# Altium PCB PCB.PcbDoc
Units mm, origin at the board's own origin, x right, y up, seen from the top; angles counter-clockwise.
Board outline 152.4 x 101.6 mm, 2 copper layers (Top Layer, Bottom Layer); 14 components, 16 nets, 56 pads, 0 vias.
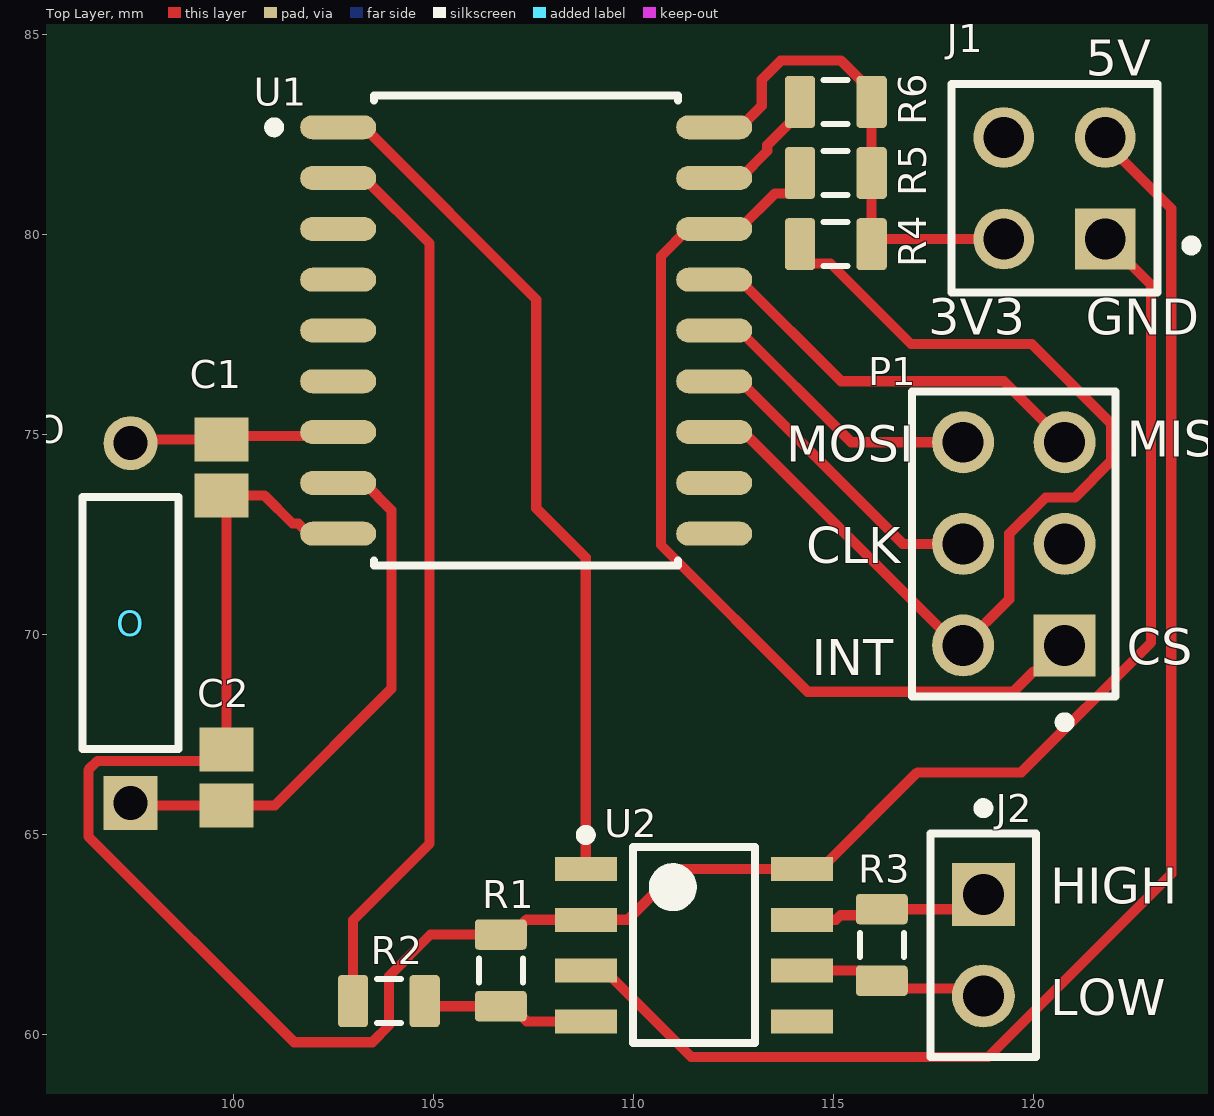
[diagram p0: Top Layer view]
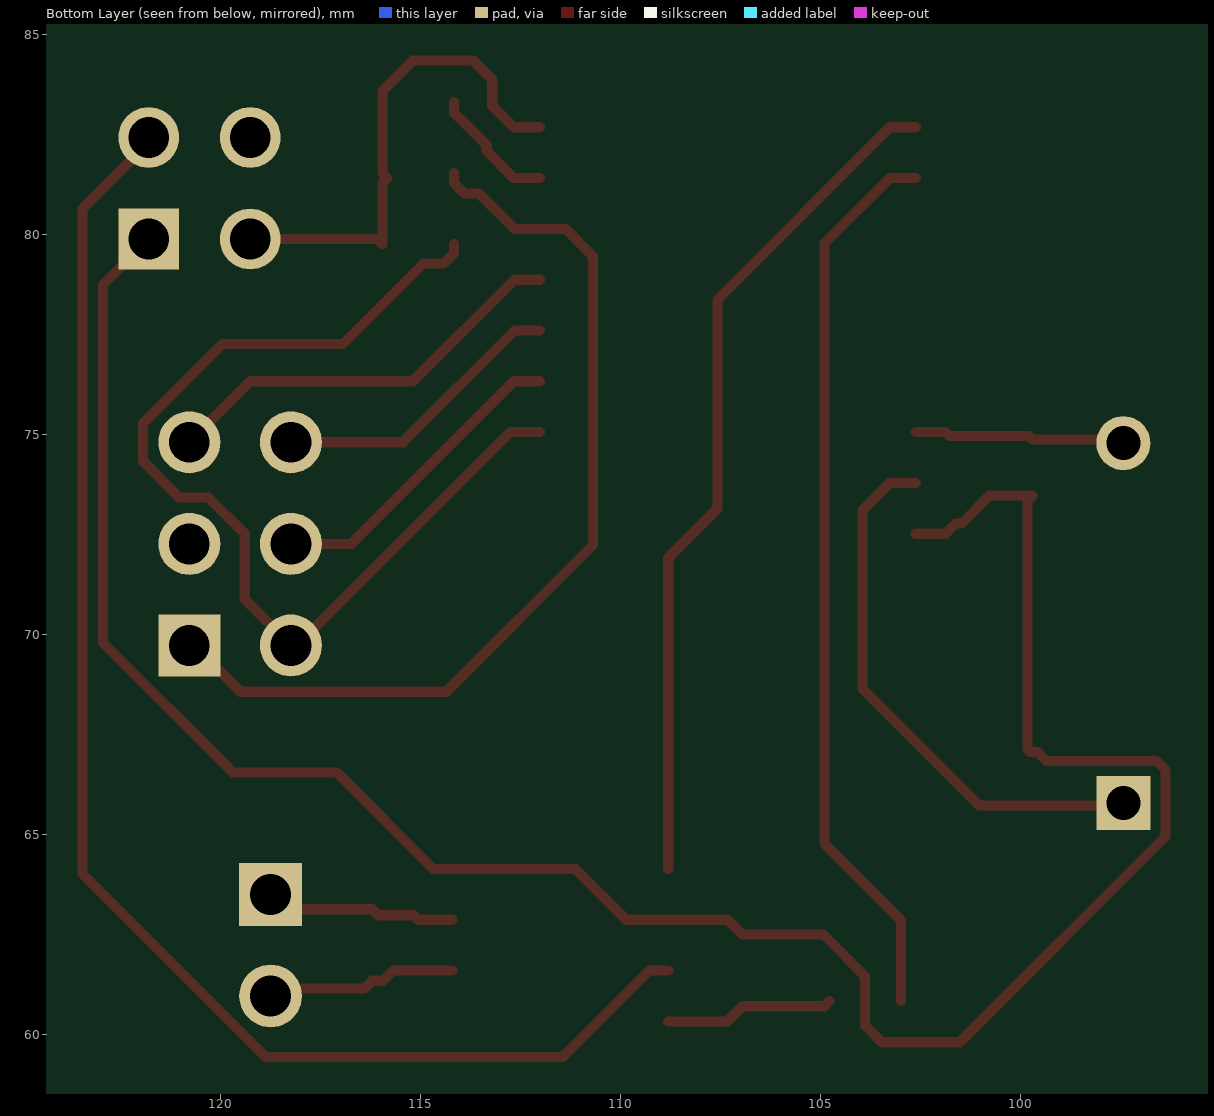
[diagram p1: Bottom Layer view, seen from below]
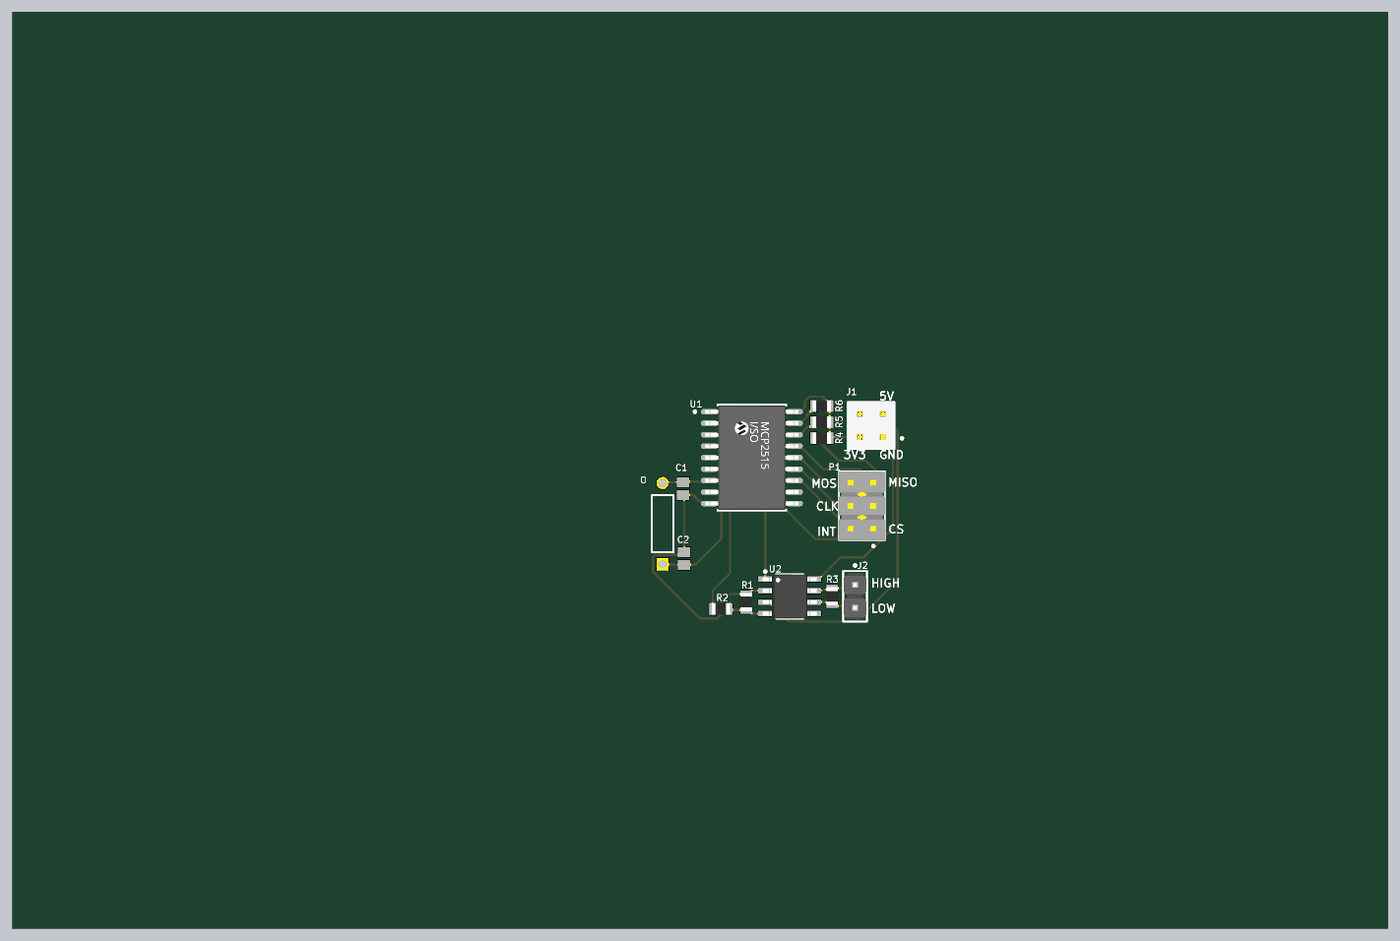
[diagram p2: 3D render of the assembled board from above, using the file's embedded part models]

## Layer stack, top to bottom
Top Solder: solder mask 0.0102, Solder Resist, Dk 3.5
Top Layer: signal copper 0.0356
Dielectric 1: dielectric 0.32, FR-4, Dk 4.8
Bottom Layer: signal copper 0.0356
Bottom Solder: solder mask 0.0102, Solder Resist, Dk 3.5

## Board outline
25.4,25.4 177.8,25.4 177.8,127 25.4,127

## Design rules (kind name [scope] priority, off if disabled: settings)
Clearance [All] p1: gap=0.254 ignorepadtopadclearanceinfootprint=FALSE except(0: Arc-Hole Track-Hole SMDPad-Hole THPad-Hole Via-Hole Fill-Hole Poly-Hole Region-Hole Text-Hole)
PolygonConnect [All] p1: connectstyle=Relief reliefconductorwidth=0.254 reliefentries=4 polygonreliefangle="90 Angle" airgapwidth=0.254
RoutingVias [All] p1: holewidth=0.711 width=1.27 viastyle="Through Hole" minholewidth=0.711 minwidth=1.27 maxholewidth=0.711 maxwidth=1.27
SolderMaskExpansion [All] p1: expansion=0.102 istentingtop=FALSE
Width [All] p1: maxlimit=0.254 minlimit=0.254 preferedwidth=0.254
30 further rules are at their usual default settings.

## Classes and differential pairs
component class Sheet1: C1 C2 O R1 R2 R3 R4 R5 R6 U1 U2
component class RaspPI: J1 J2 P1

## Components (designator, comment, footprint, x,y, rotation, side; value= is the part's Value field where it differs from the comment)
C1 "22pF" CAPC2013X140X50LL20T25 99.695,74.168 r90 top
C2 "22pF" CAPC2013X140X50LL20T25 99.822,66.421 r270 top
J1 "HTSW-102-07-G-D" FP-HTSW-102-07-G-D-MFG 120.523,81.153 r90 top
J2 "M20-9990246" FP-M20-9990246-MFG 118.745,62.23 r270 top
O "16MHz" RESA60-630X240 97.427,70.279 r90 top
P1 "TSW-103-08-L-D" SMTC-TSW-103-08-L-D_V 119.507,72.263 r90 top
R1 "1KR5J" RESC0805(2012)_L 106.68,61.595 r270 top value=22kΩ
R2 "1KR5J" RESC0805(2012)_L 103.886,60.833 r0 top value=10kΩ
R3 "1KR5J" RESC0805(2012)_L 116.205,62.23 r270 top value=120Ω
R4 "1KR5J" RESC0805(2012)_L 115.051,79.756 r180 top value=4.7kΩ
R5 "1KR5J" RESC0805(2012)_L 115.051,81.534 r180 top value=4.7kΩ
R6 "1KR5J" RESC0805(2012)_L 115.051,83.312 r180 top value=4.7kΩ
U1 "MCP2515-I/SO" FP-C04-051-MFG 107.315,77.597 r0 top
U2 "MCP2551-I/SN" MCHP-SN8_V 111.506,62.23 r0 top

## Footprints (in the part's own frame and the unit in brackets; to place one, negate y for a bottom-side part, rotate by r counter-clockwise, add the part's x,y. Pads: shape width x height; smd on the part's side, far side on the other; paste and mask are expansions set on the pad)
CAPC2013X140X50LL20T25 [mm] "Chip Capacitor, 2-Leads, Body 2.00x1.25mm, IPC High Density"
  rect 1.1x1.35 smd: 1(-0.7,0) 2(0.7,0)
  body extent -1.1,-0.72 1.1,0.72, height 1.4
FP-C04-051-MFG [mm]
  rrect100% 1.9x0.6 smd paste+0 mask+0: 1(-4.7,5.08) 2(-4.7,3.81) 3(-4.7,2.54) 4(-4.7,1.27) 5(-4.7,0) 6(-4.7,-1.27) 7(-4.7,-2.54) 8(-4.7,-3.81) 9(-4.7,-5.08) 10(4.7,-5.08) 11(4.7,-3.81) 12(4.7,-2.54) 13(4.7,-1.27) 14(4.7,0) 15(4.7,1.27) 16(4.7,2.54) 17(4.7,3.81) 18(4.7,5.08)
  silkscreen extent -6.42,-5.87 3.8,5.87, body extent -5.75,-6.12 5.75,6.12, height 0.25
FP-HTSW-102-07-G-D-MFG [mm]
  rect 1.52x1.52 hole 1.02 paste-1000 mask+0: 1(-1.27,-1.27)
  round 1.52 hole 1.02 paste-1000 mask+0: 2(-1.27,1.27) 3(1.27,-1.27) 4(1.27,1.27)
  silkscreen extent -2.6,-3.55 2.6,2.58, body extent -2.7,-2.68 2.7,2.68, height 0.25
FP-M20-9990246-MFG [mm]
  rect 1.57x1.57 hole 1.02 paste-1000 mask+0: 1(-1.27,0)
  round 1.57 hole 1.02 paste-1000 mask+0: 2(1.27,0)
  silkscreen extent -3.55,-1.32 2.79,1.32, body extent -2.89,-1.42 2.89,1.42, height 0.25
MCHP-SN8_V [mm] "SOIC, 8-Leads, Body 4.9x3.9mm, Pitch 1.27mm"
  rect 1.55x0.6 smd: 1(-2.7,1.905) 2(-2.7,0.635) 3(-2.7,-0.635) 4(-2.7,-1.905) 5(2.7,-1.905) 6(2.7,-0.635) 7(2.7,0.635) 8(2.7,1.905)
  silkscreen extent -2.82,-2.45 1.53,2.88, body extent -3,-2.45 3,2.45, height 1.75
RESA60-630X240 [mm] "Axial Resistor, 2-Leads, Dia 2.4mm, Body Length 6.3mm"
  rect 1.35x1.35 hole 0.85: 1(-4.5,0)
  round 1.35 hole 0.85: 2(4.5,0)
  silkscreen extent -3.15,-1.2 3.15,1.2, body extent -3.15,-1.2 3.15,1.2, height 2.4
RESC0805(2012)_L [mm] "Chip Resistor, Body 2.0x1.3mm, IPC High Density"
  rrect25% 0.76x1.3 smd: 1(-0.9,0) 2(0.89,0)
  silkscreen extent -0.3,-0.55 0.3,0.55, body extent -1,-0.62 1,0.63, height 0.6
SMTC-TSW-103-08-L-D_V [mm] "CONN, 6-Leads, Body 7.62x5.08mm, Pitch 2.54mm"
  rect 1.55x1.55 hole 1.02: 1(-2.54,-1.27)
  round 1.55 hole 1.02: 2(-2.54,1.27) 3(0,-1.27) 4(0,1.27) 5(2.54,-1.27) 6(2.54,1.27)
  silkscreen extent -4.58,-2.54 3.81,2.54, body extent -3.81,-2.54 3.81,2.54, height 8.38

## Part data
C1 C2: library part CMP-2000-05810-1, "Chip Capacitor, 2.2 uF, +/- 10%, 10 V, -55 to 85 degC, 0805 (2012 Metric), RoHS, Tape and Reel", Capacitance=2.2µF, Case Size/Dimension=0805, Dielectric=X5R, Manufacturer=AVX, Package Description="2-Pin Surface Mount Device, Body 2.01 x 1.25 mm", Rated Voltage=10V, Tolerance (%)=±10%, Datasheet URL=http://datasheets.avx.com/cx5r.pdf, Datasheet Version=05/2016, Manufacturer URL=http://www.avx.com/, Mounting Technology=SurfaceMount, Package Reference=0805
J1: library part CMP-02766-000010-1, "CONN HEADER VERT 4POS 2.54MM", Current Rating=6.3A, Manufacturer=Samtec, Temperature="-55°C to +125°C", Temperature Range High=+125°C, Temperature Range Low=-55°C, Voltage Rating=550V, Automotive=No, Category=Conn, ComponentLink2Description=Datasheet, ComponentLink2URL=http://suddendocs.samtec.com/catalog_english/htsw_th.pdf, Conn Gender=Male, Conn Orientation=Straight, Contact Material=Gold,Nickel, Device Class L1=Connectors, Device Class L2="Headers and Wire Housings", Device Class L3=unset, Digikey Description="CONN HEADER VERT 4POS 2.54MM", Height=8.71mm, Lead Free=Yes, Manufacturer Part Number=HTSW-102-07-G-D, Mouser Description="Conn Unshrouded Header HDR 4 POS 2.54mm Solder ST Thru-Hole Bag", Number Of Contacts=4, Number Of Rows=2, Octopart=https://octopart.com/htsw-102-07-g-d-samtec-10531767, Package=HTSW-102-07-G-D, Pitch=2.54mm, RoHS=TRUE
J2: library part CMP-15831-000009-1, "CONN HEADER VERT 2POS 2.54MM", Current Rating=3A, Manufacturer=Harwin, Temperature="-40°C to +105°C", Temperature Range High=+105°C, Temperature Range Low=-40°C, Automotive=No, Category=Conn, ComponentLink2Description=Datasheet, ComponentLink2URL=https://cdn.harwin.com/pdfs/M20-999.pdf, Conn Gender=Male, Conn Orientation=Vertical, Contact Material=Tin,Nickel, Device Class L1=Connectors, Device Class L2="Headers and Wire Housings", Device Class L3=unset, Digikey Description="CONN HEADER VERT 2POS 2.54MM", Height=8.99mm, Lead Free=Yes, Manufacturer Part Number=M20-9990246, Mouser Description="2.54mm (0.1\") Pitch SIL Vertical PC Tail Pin Header, 6.1mm mating pin height, tin, 2 contacts", Number Of Contacts=2, Number Of Rows=1, Octopart=https://octopart.com/m20-9990246-harwin-2590635, Package=M20-9990246, Pitch=2.54mm, RoHS=TRUE
O: library part CMP-1659-00075-1, "Axial Resistor, 1 KOhm, +/- 1%, 250 mW, -55 to 155 degC, 2-Pin THD, RoHS, Bulk", Case\Package=Axial, Max Operating Temperature="155 degC", Min Operating Temperature="-55 degC", Package Quantity=200, Power Rating="250 mW", Resistance="10 kohm", Tolerance=1%, Voltage Rating="250 V", ComponentLink1Description="Manufacturer URL", ComponentLink1URL=http://www.yageo.com/, ComponentLink2Description=Datasheet, ComponentLink2URL=http://www.yageo.com/documents/recent/Yageo%20LR_MFR_2013.pdf, DatasheetVersion=Apr-13, Length="0.248 inch", PackageDescription="2-Pin Axial Lead, Dia 2.4 mm, Body Length 6.3 mm", PackageReference=MFR-25, Packaging=Bulk, RoHSCompliant=true
P1: library part CMP-1024-00336-5, "Male Header, Pitch 2.54 mm, 2 x 3 Position, Height 8.38 mm, Tail Length 5.08 mm, -55 to 125 degC, RoHS, Bulk", Manufacturer=Samtec, Max Operating Temperature="125 degC", Min Operating Temperature="-55 degC", ComponentLink1Description="Manufacturer URL", ComponentLink1URL=http://www.samtec.com/, ComponentLink2Description=Datasheet, ComponentLink2URL=https://datasheet.ciiva.com/25618/0900766b81154476-25618436.pdf, ComponentLink3Description="Package Specification", ComponentLink3URL=http://suddendocs.samtec.com/prints/tsw-xxx-xx-x-x-xx-xxx-footprint.pdf, DatasheetVersion=04/2012, Lead Pitch="2.54 mm", Mount="Through Hole", Mounting Technology="Through Hole", PackageDescription="Male Header, Pitch 2.54 mm, 2 x 3 Position, Height 8.38 mm, Tail Length 5.08 mm", PackageReference=TSW-103-08-L-D, RoHSCompliant=true
R1 R2 R3 R4 R5 R6: library part CMP-009-00076-1, "1K 0.125W 5% 0805 (2012 Metric)  SMD", Case/Package=0805, Power=0.125W, Tolerance=5%, Mounting Technology=SMT, Pins=2
U1: library part CMP-0186-00133-3, "IC CAN CONTROLLER W/SPI 18SOIC", Ambient Temperature Range High=+125°C, Ambient Temperature Range Low=-65°C, Manufacturer=Microchip, Max Supply Voltage=5.5V, Min Supply Voltage=2.7V, Nominal Supply Current=10mA, Package=C04-051, Temperature="-40°C to +85°C", Temperature Range High=+85°C, Temperature Range Low=-40°C, Automotive=No, Category=IC, ComponentLink2Description=Datasheet, ComponentLink2URL=http://ww1.microchip.com/downloads/en/DeviceDoc/MCP2515-Stand-Alone-CAN-Controller-with-SPI-20001801J.pdf, Device Class L1="Integrated Circuits (ICs)", Device Class L2="Interface ICs", Device Class L3=Controllers, Digikey Description="IC CAN CONTROLLER W/SPI 18SOIC", Footprint Url=http://ww1.microchip.com/downloads/en/DeviceDoc/18L_SOIC_Wide_7.50_SO_C04-0051D.pdf, Function=Controller, Height=2.65mm, Interface=SPI,CAN, Ipc Land Pattern Name=SOIC127P1030X265-18, Lead Free=Yes, Manufacturer Part Number=MCP2515-I/SO, Mouser Description="CAN Interface IC W/ SPI Interface", Octopart=https://octopart.com/mcp2515-i%2Fso-microchip-430187, RoHS=TRUE, Standoff Height=0.1mm
U2: library part CMP-0186-00138-3, "High-Speed CAN Transceiver, /  1 Mb/s, 4.5 to 5.5 V, 8-Pin SOIC (SN), Industrial Temperature, RoHS, Tube", Manufacturer=Microchip, ComponentLink1Description="Manufacturer URL", ComponentLink1URL=http://www.microchip.com/, ComponentLink2Description=Datasheet, ComponentLink2URL=http://ww1.microchip.com/downloads/en/DeviceDoc/21667f.pdf, ComponentLink3Description="Package Specification", ComponentLink3URL=http://www.microchip.com/stellent/groups/techpub_sg/documents/packagingspec/en012702.pdf, DatasheetVersion="Rev. F, 07/2010", Mounting Technology="Surface Mount", PackageDescription="8-Pin Small Outline Integrated Circuit, Body 4.9 x 3.9 mm, Pitch 1.27 mm", PackageReference=SN8, RoHSCompliant=true

## Nets (pads, with @x,y where several pads share a name; then routed paths per layer and width w, separated by ;. In a path a pad name is that pad's centre, name@x,y a point inside that pad or via, vN(x,y) a via of type N, cw(c..) or ccw(c..) an arc to the next point about the centre after c; other vN are vias at no path point)
3V3: J1.2 R4.1 R5.1 R6.1 U1.18 | length 12.6
  Top Layer w0.254: U1.18 112.665,82.677 113.205,83.217 113.205,83.869 113.679,84.343 115.19,84.343 115.951,83.582 R6.1 R5.1 115.824,81.407 115.951,81.28 R4.1 116.078,79.883 J1.2
5V: J1.3 U2.3 | length 36.5
  Top Layer w0.254: U2.3 109.281,61.595 111.44,59.436 118.87,59.436 123.444,64.01 123.444,80.645 121.793,82.296 J1.3
GND: C1.1 C2.1 J1.1 R1.1 U1.9 U2.2 U2.8 | length 59.2
  Top Layer w0.254: U1.9 101.871,72.517 101.617,72.771 101.473,72.771 100.776,73.468 C1.1 99.822,73.341 C2.1 99.757,67.056 99.568,67.056 99.347,66.835 96.594,66.835 96.371,66.612 96.371,64.947 101.516,59.802 103.468,59.802 103.886,60.22 103.886,61.456 104.925,62.495 R1.1 106.95,62.495 107.32,62.865 U2.2 109.855,62.865 111.125,64.135 U2.8 114.681,64.135 117.095,66.549 119.692,66.549 122.936,69.793 122.936,78.74 J1.1
NetC1_2: C1.2 O.2 U1.7 | length 5.3
  Top Layer w0.254: O.2 97.516,74.868 C1.2 99.784,74.957 101.771,74.957 101.871,75.057 U1.7
NetC2_2: C2.2 O.1 U1.8 | length 13.8
  Top Layer w0.254: O.1 97.486,65.721 C2.2 101.03,65.721 103.946,68.637 103.946,73.106 103.265,73.787 U1.8
NetJ2_1: J2.1 R3.1 U2.7 | length 4.8
  Top Layer w0.254: U2.7 115.062,62.865 115.174,62.977 116.052,62.977 R3.1 118.121,63.13 118.491,63.5 J2.1
NetJ2_2: J2.2 R3.2 U2.6 | length 4.8
  Top Layer w0.254: U2.6 115.68,61.595 115.935,61.34 R3.2 116.395,61.15 118.428,61.15 118.618,60.96 J2.2
NetP1_1: P1.1 R5.2 U1.16 | length 23.8
  Top Layer w0.254: R5.2 114.161,81.279 113.908,81.026 113.538,81.026 112.649,80.137 U1.16 111.365,80.137 110.684,79.456 110.684,72.235 114.352,68.567 119.494,68.567 120.002,69.075 120.129,69.075 P1.1
NetP1_2: P1.2 R4.2 U1.12 | length 25.7
  Top Layer w0.254: U1.12 112.759,75.057 118.093,69.723 P1.2 119.393,70.879 119.393,72.514 120.298,73.419 121.028,73.419 121.933,74.324 121.933,75.282 119.957,77.257 116.936,77.257 114.922,79.272 114.414,79.272 114.161,79.525 R4.2
NetP1_4: P1.4 U1.13 | length 7.9
  Top Layer w0.254: U1.13 112.665,76.327 116.729,72.263 P1.4
NetP1_5: P1.5 U1.15 | length 10.4
  Top Layer w0.254: U1.15 112.649,78.867 115.189,76.327 119.253,76.327 P1.5
NetP1_6: P1.6 U1.14 | length 7.4
  Top Layer w0.254: U1.14 112.649,77.597 115.443,74.803 P1.6
NetR1_2: R1.2 R2.2 U2.4 | length 4.2
  Top Layer w0.254: R2.2 104.904,60.705 R1.2 106.95,60.705 107.33,60.325 U2.4
NetR2_1: R2.1 U1.2 | length 22.7
  Top Layer w0.254: U1.2 103.265,81.407 104.902,79.77 104.902,64.77 102.986,62.854 R2.1
NetR6_2: R6.2 U1.17 | length 3.2
  Top Layer w0.254: U1.17 112.665,81.407 113.34,82.082 113.34,82.227 113.903,82.789 113.908,82.789 114.161,83.042 R6.2
NetU1_1: U1.1 U2.1 | length 21.5
  Top Layer w0.254: U1.1 103.265,82.677 107.569,78.373 107.569,73.152 108.806,71.915 U2.1
pads on no net: J1.4 P1.3 U1.3 U1.4 U1.5 U1.6 U1.10 U1.11 U2.5

## Silkscreen, mask and mechanical layers (free items; w line width, h text height)
Top Overlay:
  text "5V" at 121.308,83.97 h0.9
  text "3V3" at 117.371,77.493 h0.9
  text "GND" at 121.308,77.493 h0.9
  text "MISO" at 122.324,74.445 h0.9
  text "MOSI" at 113.815,74.318 h0.9
  text "CLK" at 114.323,71.778 h0.9
  text "CS" at 122.324,69.238 h0.9
  text "INT" at 114.45,68.984 h0.9
  text "HIGH" at 120.419,63.269 h0.9
  text "LOW" at 120.419,60.475 h0.9